# Altium PCB OnePhaseSemLogica_V3.PcbDoc (part 2 of 2)
Units mm, origin at the board's own origin, x right, y up, seen from the top; angles counter-clockwise.
Board outline 104 x 162 mm, 2 copper layers (Top Layer, Bottom Layer); 211 components, 101 nets, 566 pads, 110 vias.
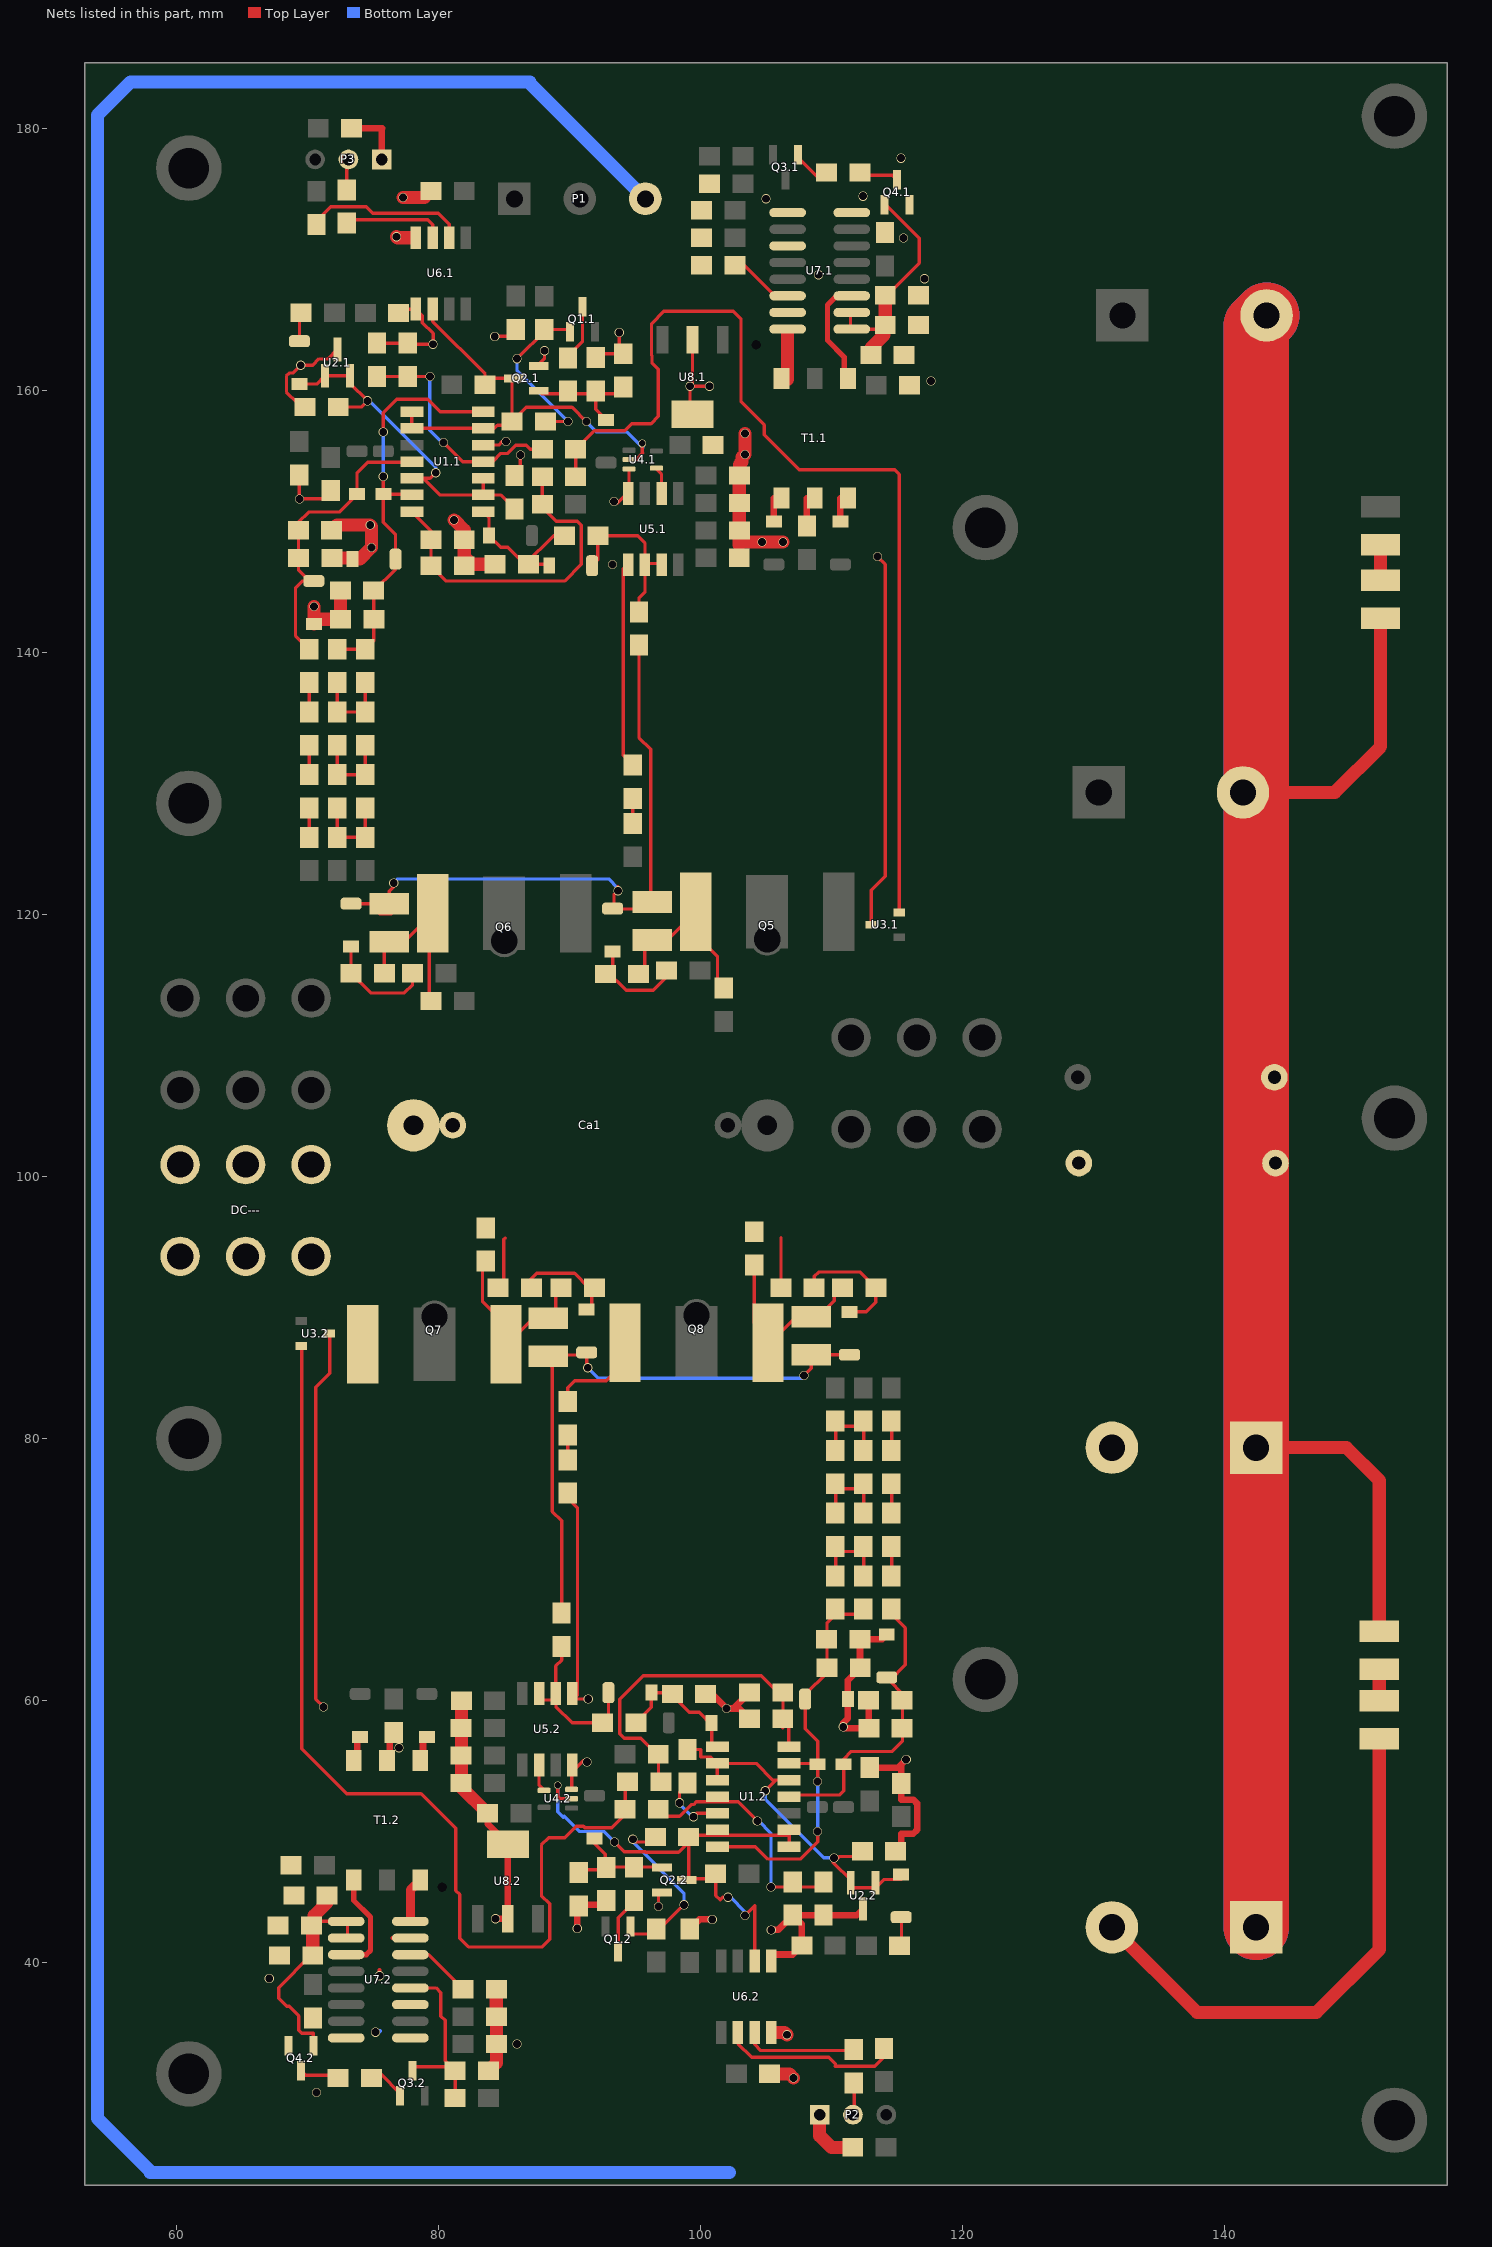
[diagram p2: the nets of this part, all layers, seen from the top]

## Via types
v1: diameter 0.7, hole 0.6, Top Layer to Bottom Layer, 107 vias
v2: diameter 0.6, hole 0.5, Top Layer to Bottom Layer, 3 vias

## Nets (pads, with @x,y where several pads share a name; then routed paths per layer and width w, separated by ;. In a path a pad name is that pad's centre, name@x,y a point inside that pad or via, vN(x,y) a via of type N, cw(c..) or ccw(c..) an arc to the next point about the centre after c; other vN are vias at no path point) (continued)
DT_CON.2: C23.2.2 Q3.2.3 R26.2.2 U7.2.4 | length 14.3
  Top Layer w0.254: U7.2.4@77.868,38.073 79.827,38.073 80.194,37.706 80.194,35.927 80.518,35.603 80.518,32.516 R26.2.2@80.985,32.049 ; Q3.2.3@78.018,31.958 78.109,32.049 R26.2.2@80.985,32.049 ; C23.2.2@81.285,29.672 R26.2.2@81.285,31.749 R26.2.2@80.985,32.049 ; R26.2.2@81.285,32.049 R26.2.2@80.985,32.049
FEEDBACK.1: U7.1.3
FEEDBACK.2: U7.2.3
G1: D7.1.2 R23.1.2 R39.1.2 U5.1.6 U5.1.7 | length 13
  Top Layer w0.254: D7.1.2@91.735,146.6 92.177,147.042 R23.1.2@92.177,148.891 95.209,148.891 95.765,148.335 U5.1.6@95.765,146.775 ; R39.1.2@95.309,143.077 95.309,144.109 95.765,144.565 U5.1.6@95.765,146.675 U5.1.6@95.765,146.775 ; U5.1.7@97.035,146.775 U5.1.6@95.765,146.775
G2: D7.2.2 R23.2.2 R39.2.2 U5.2.6 U5.2.7 | length 14.5
  Top Layer w0.254: U5.2.7@87.706,60.042 U5.2.6@88.976,60.042 ; U5.2.6@88.953,60.433 88.953,62.643 89.408,63.098 R39.2.2@89.408,64.131 ; 88.976,62.252 U5.2.6@88.976,60.042 ; R23.2.2@92.541,58.317 R23.2.2@92.564,58.34 ; D7.2.2@92.983,60.608 92.983,58.759 R23.2.2@92.564,58.34 ; U5.2.6@88.976,60.042 88.976,59.524 90.2,58.3 92.564,58.3 R23.2.2@92.564,58.34
GND: C17.1.1 C17.2.1 C24.1.1 C24.2.1 C25.1.2 C25.2.2 Cin1.1.2 Cin1.2.2 Cin2.1.2 Cin2.2.2 P1.3 P2.1 P3.1 Q4.1.2 Q4.2.2 R26.1.1 R26.2.1 R27.1.1 R27.2.1 R28.1.1 R28.2.1 R29.1.1 R29.2.1 R30.1.1 R30.2.1 R36.2 R37.2 U6.1.4 U6.2.4 U7.1.1 U7.1.7 U7.1.16 U7.2.1 U7.2.7 U7.2.16 | length 275.7
  Top Layer w0.254: Q4.2.2@68.568,33.658 68.41,33.5 Q4.2.2@68.649,33.5 ; U7.2.16@71.966,34.263 U7.2.16@72.968,34.263
  Top Layer w0.3: U7.2.16@72.968,34.263 U7.2.16@73.03,34.2 ; v1(75.518,39.008) 75.518,39.451 ; U7.2.7@76.501,41.883 U7.2.7@77.868,41.883 ; U7.2.1@77.805,34.2 U7.2.1@77.868,34.263
  Top Layer w0.5: R37.2@73.377,179.991 75.704,179.991 75.68,179.966 P3.1@75.68,177.6
  Top Layer w1: R29.2.1@68.962,45.116 R29.2.1@68.976,45.13 R29.2.1@68.962,45.143 ; v1(76.8,171.7) 76.875,171.625 U6.1.4@77.9,171.625 ; v1(77.3,174.7) 78.946,174.7 C17.1.1@79.437,175.191 ; R26.2.1@83.825,31.749 84.425,32.349 R30.2.1@84.425,33.792 C25.2.2@84.425,35.878 84.423,35.88 R27.2.1@84.423,37.986 ; C17.2.1@105.281,31.517 106.783,31.517 v1(107.1,31.2) ; U6.2.4@105.6,34.675 106.425,34.675 v1(106.6,34.5) ; P2.1@109.1,28.4 109.1,26.8 110.007,25.893 R36.2@111.607,25.893
  Bottom Layer w0.3: v1@75.1,34.6 75.335,34.6 75.535,34.8 v1@75.518,34.8
  Bottom Layer w1: 58,24.004 58.1,24.004 ; 87,183.5 86.9,183.5 ; P1.3@95.8,174.6 86.9,183.5 ; 102.204,24.004 58.1,24.004 ; 58.1,24.004 54.004,28.1 54.004,181.004 56.5,183.5 86.9,183.5
  other v1: 70.7,30.1 86,33.8 75.2,34.7 67.1,38.8 117.6,160.7 117.1,168.5 109,168.8 115.5,171.6 105,174.6 112.4,174.8 115.3,177.7
I_FB.1: C24.1.2 Q4.1.1 R28.1.2 R29.1.2 U7.1.9 U7.1.10 | length 17.8
  Top Layer w0.254: U7.1.10@111.45,165.925 111.45,164.655 U7.1.9@111.55,164.655 R28.1.2@113.693,164.655 ; R29.1.2@113.002,162.678 R29.1.2@113.002,163.202 ; Q4.1.1@114.05,174.15 114.15,174.15 116.7,171.6 116.7,169.7 C24.1.2@114.25,167.25 ; C24.1.2@114.102,167.25 C24.1.2@114.35,167.25
  Top Layer w1: R29.1.2@113.002,163.202 114.002,164.202 R28.1.2@114.002,164.964 ; R28.1.2@114.102,164.964 C24.1.2@114.102,167.25
I_FB.2: C24.2.2 Q4.2.1 R28.2.2 R29.2.2 U7.2.9 U7.2.10 | length 18.4
  Top Layer w0.254: C24.2.2@70.168,40.558 C24.2.2@70.416,40.558 ; C24.2.2@70.268,40.558 67.818,38.108 67.818,37.291 68.432,36.677 68.623,36.677 69.36,35.94 69.36,34.832 69.583,34.608 70.468,34.608 Q4.2.1@70.468,33.658 ; R28.2.2@70.416,42.844 70.416,43.606 ; R28.2.2@70.825,43.153 U7.2.9@72.968,43.153 73.068,43.153 U7.2.10@73.068,41.883 ; R29.2.2@71.516,44.606 R29.2.2@71.516,45.13
  Top Layer w1: C24.2.2@70.416,40.558 R28.2.2@70.416,42.844 ; 70.516,43.606 R29.2.2@71.516,44.606
NetC1.1_1: C1.1.1 C2.1.2 R2.1.2 R3.1.2 | length 6.6
  Top Layer w0.254: C1.1.1@72.287,137.686 C2.1.2@72.287,135.443 R3.1.2@74.428,135.443 R2.1.2@74.428,137.686
NetC1.1_2: C1.1.2 C6.1.1 D1.1.1 D2.1.2 R2.1.1 R14.1.2 U1.1.6 U1.1.14 | length 32.2
  Top Layer w0.254: C1.1.2@72.287,140.226 R2.1.1@74.428,140.226 75.08,140.879 R14.1.2@75.08,142.515 75.08,144.692 76.735,146.347 D2.1.2@76.735,147.1 76.735,148.965 75.8,149.9 D1.1.1@75.8,152.065 ; v1@75.8,153.3 D1.1.1@75.8,152.065 ; v1(75.8,156.8) 75.8,158.282 76.81,159.292 79.208,159.292 80.15,158.35 U1.1.14@83.425,158.35 ; U1.1.6@77.975,152 77.91,152.065 D1.1.1@75.8,152.065
  Bottom Layer w0.254: v1@75.8,153.3 v1(75.8,153.4) v1(75.8,156.8)
NetC1.2_1: C1.2.1 C2.2.2 R2.2.2 R3.2.2 | length 6.6
  Top Layer w0.254: R2.2.2@110.313,69.131 110.313,71.375 112.454,71.375 C1.2.1@112.454,69.131
NetC1.2_2: C1.2.2 C6.2.1 D1.2.1 D2.2.2 R2.2.1 R14.2.2 U1.2.6 U1.2.14 | length 31.7
  Top Layer w0.254: U1.2.14@101.293,48.858 104.2,48.858 105.15,47.908 107.608,47.908 108.941,49.241 v1(108.941,50.017) ; U1.2.6@106.743,55.208 108.876,55.208 D1.2.1@108.941,55.143 ; v1(108.941,53.817) D1.2.1@108.941,55.143 ; C1.2.2@112.454,66.591 110.313,66.591 109.661,65.939 109.661,62.125 108.006,60.47 108.006,57.852 108.941,56.917 D1.2.1@108.941,55.143
  Bottom Layer w0.254: v1(108.941,50.017) v1(108.941,53.817)
NetC2.1_1: C2.1.1 C3.1.2 R3.1.1 R4.1.2 | length 6.6
  Top Layer w0.254: C2.1.1@72.287,132.903 C3.1.2@72.287,130.659 R4.1.2@74.428,130.659 R3.1.1@74.428,132.903
NetC2.2_1: C2.2.1 C3.2.2 R3.2.1 R4.2.2 | length 6.6
  Top Layer w0.254: R3.2.1@110.313,73.915 110.313,76.158 112.454,76.158 C2.2.1@112.454,73.915
NetC3.1_1: C3.1.1 C4.1.2 R4.1.1 R5.1.1 | length 6.6
  Top Layer w0.254: C3.1.1@72.287,128.119 C4.1.2@72.287,125.875 R5.1.1@74.428,125.875 R4.1.1@74.428,128.119
NetC3.2_1: C3.2.1 C4.2.2 R4.2.1 R5.2.1 | length 6.6
  Top Layer w0.254: R4.2.1@110.313,78.698 110.313,80.942 112.454,80.942 C3.2.1@112.454,78.698
NetC5.1_1: C5.1.1 D3.1.1 D4.1.2 R9.1.1 R11.1.2 U1.1.4 | length 23.9
  Top Layer w0.254: R9.1.1@70.146,140.226 69.1,141.272 69.1,144.9 69.635,145.435 D4.1.2@70.165,145.435 ; D4.1.2@70.5,145.435 D4.1.2@70.165,145.435 ; D4.1.2@70.165,145.435 69.323,146.277 R11.1.2@69.323,149.309 69.323,149.923 70.1,150.7 72.435,150.7 D3.1.1@73.8,152.065 73.8,153.7 74.599,154.499 U1.1.4@77.199,154.499 ; U1.1.4@77.199,154.499 77.975,154.499 U1.1.4@77.975,154.54 77.24,154.54 U1.1.4@77.199,154.499
NetC5.2_1: C5.2.1 D3.2.1 D4.2.2 R9.2.1 R11.2.2 U1.2.4 | length 22.9
  Top Layer w0.254: U1.2.4@106.743,52.617 106.925,52.8 110.624,52.8 110.941,53.117 110.941,55.541 111.517,56.117 114.641,56.117 115.418,56.894 115.418,60.54 114.429,61.529 115.641,62.741 115.641,65.546 R9.2.1@114.595,66.591
NetC7.1_1: C7.1.1 D5.1.1 Q2.1.1 R13.1.2 R15.1.1 | length 8.9
  Top Layer w0.254: Q2.1.1@87.65,159.95 87.877,159.723 R15.1.1@92.009,159.723 ; D5.1.1@92.8,157.735 92.009,158.526 R15.1.1@92.009,159.723 ; C7.1.1@94.109,159.737 94.096,159.723 R15.1.1@92.009,159.723
NetC7.2_1: C7.2.1 D5.2.1 Q2.2.1 R13.2.2 R15.2.1 | length 8.4
  Top Layer w0.254: C7.2.1@90.631,47.08 90.645,47.094 R15.2.1@92.731,47.094 ; D5.2.1@91.941,49.082 92.731,48.292 92.731,47.3 96.658,47.3 Q2.2.1@96.864,47.094
NetC8.1_1: C8.1.1 R17.1.1 R20.1.1 U1.1.11 | length 18.4
  Top Layer w0.254: C8.1.1@75.325,161.044 R20.1.1@77.675,161.044 v1(79.356,161.044) ; v1(80.4,156) 81.86,154.54 U1.1.11@83.425,154.54 84.14,154.54 84.769,155.169 85.285,155.169 85.916,155.799 86.7,155.799 87.008,155.491 R17.1.1@87.937,155.491
  Bottom Layer w0.254: v1(79.356,161.044) 79.356,156.944 80.3,156 v1(80.4,156)
NetC8.2_1: C8.2.1 R17.2.1 R20.2.1 U1.2.11 | length 18.2
  Top Layer w0.254: R17.2.1@96.804,51.327 96.962,51.169 98.403,51.169 99.307,52.073 99.473,52.073 99.677,52.277 102.881,52.277 v1(104.341,50.817) ; v1(105.385,45.773) C8.2.1@109.416,45.773
  Bottom Layer w0.254: v1(104.341,50.817) 104.441,50.817 105.385,49.873 v1(105.385,45.773)
NetC9.1_1: C9.1.1 R16.1.1 R18.1.1 R21.1.1 U1.1.7 | length 26.1
  Top Layer w0.254: U1.1.7@77.975,150.73 79.437,149.268 C9.1.1@79.437,148.591 R21.1.1@79.437,146.591 80.597,145.43 89.63,145.43 90.899,146.699 90.899,147.426 90.9,147.427 90.9,149.7 90.6,150 89,150 87.937,151.063 R16.1.1@87.937,151.291 R18.1.1@87.937,153.391
NetC9.2_1: C9.2.1 R16.2.1 R18.2.1 R21.2.1 U1.2.7 | length 27.2
  Top Layer w0.254: R18.2.1@96.804,53.427 96.804,55.754 95.441,57.117 94.183,57.117 93.841,57.459 93.841,59.391 93.842,59.392 93.842,60.118 95.624,61.9 104.631,61.9 106.304,60.227 C9.2.1@106.304,58.617 ; C9.2.1@106.281,57.94 C9.2.1@106.281,58.617 106.743,58.155 U1.2.7@106.743,56.478
NetC14.1_1: C14.1.1 D7.1.1 D8.1.1 R23.1.1 U1.1.8 | length 11.3
  Top Layer w0.254: U1.1.8@83.425,150.73 83.865,150.29 D8.1.1@83.865,148.9 84.765,148 85.3,148 86.591,146.709 C14.1.1@86.609,146.709 ; D7.1.1@88.356,146.709 C14.1.1@86.863,146.709 C14.1.1@86.609,146.709 ; R23.1.1@89.637,148.891 88.791,148.891 C14.1.1@86.609,146.709
NetC14.2_1: C14.2.1 D7.2.1 D8.2.1 R23.2.1 U1.2.8 | length 10.1
  Top Layer w0.254: R23.2.1@95.081,58.317 96.253,59.489 D7.2.1@96.253,60.608 97.745,60.608 C14.2.1@97.854,60.498 ; C14.2.1@98.131,60.608 98.135,60.509 98.15,60.108 99.158,59.1 99.9,59.1 100.876,58.124 U1.2.8@100.876,56.527
NetC26_2: C26.2 C27.2 C28.1 C29.1 C80.1 C81.2 R33.2 R34.1 | length 290.3
  Top Layer w1: C26.2@141.4,129.3 142.4,129.3 148.4,129.3 151.9,132.8 R33.2@151.9,142.6 ; C28.1@142.4,79.3 149.3,79.3 151.8,76.8 R34.1@151.8,65.3
  Top Layer w5: C29.1@142.4,42.7 C28.1@142.4,79.3 142.4,129.3 142.4,164.9 C27.2@143.2,165.7
  Bottom Layer w5: C29.1@142.4,42.7 C28.1@142.4,79.3 142.4,164.9 C27.2@143.2,165.7
NetC28_2: C28.2 C29.2 C30.2.1 C31.2.1 C81.1 Ca1.2 DC---.1 Q7.3 Q8.3 R35.2 R41.2.2 R44.2.2 R45.2.1 | length 58.6
  Top Layer w0.254: Q7.3@74.166,87.012 Q7.3@74.166,87.2 ; C30.2.1@84.554,91.498 85,91.944 85,95.2 85.1,95.3 ; R45.2.1@89.876,82.814 89.876,83.866 90.411,84.401 92.801,84.401 94.232,85.832 Q8.3@94.232,87.3 ; Q8.3@94.24,87.3 Q8.3@94.24,88.93 ; C31.2.1@106.143,91.501 106.143,95.343
  Top Layer w1: C29.2@131.4,42.7 137.9,36.2 147,36.2 151.8,41 R35.2@151.8,57.1
NetC30.1_2: C30.1.2 D12.1.1 R40.1.2 | length 7.1
  Top Layer w0.254: R40.1.2@92.823,115.709 94.333,114.2 96.4,114.2 C30.1.2@97.423,115.223 ; R40.1.2@93.3,115.862 D12.1.1@93.3,117.165 D12.1.1@93.3,117.265
NetC30.2_2: C30.2.2 D12.2.1 R40.2.2 | length 7.2
  Top Layer w0.254: C30.2.2@86.594,91.498 C30.2.2@86.594,91.985 ; C30.2.2@86.894,91.985 87.51,92.6 90.393,92.6 R40.2.2@91.494,91.498 ; D12.2.1@91.718,89.943 R40.2.2@91.718,91.346
NetC31.1_2: C31.1.2 D13.1.1 R43.1.2 | length 8.5
  Top Layer w0.254: D13.1.1@73.342,117.545 73.335,117.538 R43.1.2@73.335,115.506 74.842,114 77.4,114 78.034,114.634 C31.1.2@78.034,115.506
NetC31.2_2: C31.2.2 D13.2.1 R43.2.2 | length 9.6
  Top Layer w0.254: C31.2.2@108.683,91.501 108.683,92.374 109.01,92.7 112.184,92.7 R43.2.2@113.382,91.501 113.382,90.382 112.663,89.663 D13.2.1@111.376,89.663 D13.2.1@111.382,89.67
NetD6.1_2: D6.1.2 R22.1.2 | length 2.2
  Top Layer w0.254: D6.1.2@69.4,163.735 R22.1.2@69.4,165.909
NetD6.2_2: D6.2.2 R22.2.2 | length 2.2
  Top Layer w0.254: R22.2.2@115.341,40.908 D6.2.2@115.341,43.082
NetD9.1_1: D9.1.1 T1.1.6 | length 1.8
  Top Layer w0.254: D9.1.1@110.669,149.982 D9.1.1@110.679,149.972
  Top Layer w0.5: D9.1.1@110.669,149.982 110.669,151.762
NetD9.2_1: D9.2.1 T1.2.6 | length 1.6
  Top Layer w0.254: D9.2.1@73.8,56.996 D9.2.1@74.039,57.235
  Top Layer w0.5: T1.2.6@73.8,55.695 D9.2.1@73.8,56.996
NetD10.1_1: D10.1.1 T1.1.4 | length 1.8
  Top Layer w0.5: D10.1.1@105.589,149.982 105.589,151.762
NetD10.2_1: D10.2.1 T1.2.4 | length 1.8
  Top Layer w0.5: T1.2.4@78.829,55.546 D10.2.1@78.829,57.325
NetD12.1_2: D12.1.2 D13.1.2 R38.1.2 R39.1.1 R42.1.2 | length 48.4
  Top Layer w0.254: D13.1.2@73.342,120.815 75.505,120.815 75.505,120.052 76.397,120.052 76.767,120.422 R42.1.2@76.767,120.81 ; R42.1.2@76.263,120.81 76.263,121.763 76.6,122.1 v1(76.6,122.4) ; D12.1.2@93.4,120.435 93.4,121.5 v1(93.7,121.8) ; v1@93.7,121.9 v1@93.7,122.1 ; D12.1.2@93.835,120.4 95.792,120.4 R38.1.2@96.329,120.937 ; R39.1.1@95.309,140.537 95.309,133.491 96.2,132.6 96.2,121.577 R38.1.2@96.585,121.193
  Bottom Layer w0.254: v1(76.6,122.4) 76.9,122.7 93,122.7 93.7,122 v1@93.7,121.9
NetD12.2_2: D12.2.2 D13.2.2 R38.2.2 R39.2.1 R42.2.2 | length 45.3
  Top Layer w0.254: R38.2.2@88.133,86.015 88.7,85.448 88.7,74.425 89.408,73.717 R39.2.1@89.408,66.671 ; R38.2.2@88.389,86.271 88.491,86.373 D12.2.2@91.318,86.373 ; D12.2.2@91.318,86.573 D12.2.2@91.318,86.373 ; v1(91.4,85.4) 91.318,85.482 D12.2.2@91.318,86.373 ; v1(107.9,84.8) 108.455,85.355 R42.2.2@108.455,86.398 ; R42.2.2@107.951,86.398 R42.2.2@107.951,86.786 ; R42.2.2@109.213,86.393 D13.2.2@111.376,86.393
  Bottom Layer w0.254: v1(91.4,85.4) 92.2,84.6 v1@107.9,84.6
NetQ1.1_1: Q1.1.1 R10.1.2 R12.1.1 | length 13.2
  Top Layer w0.254: v1(86,162.4) 88.223,164.623 89.877,164.623 Q1.1.1@90.05,164.45 ; R12.1.1@88.163,157.609 v1(89.891,157.609) v1@89.9,157.6
  Bottom Layer w0.254: v1(86,162.4) 86,161.5 v1(89.891,157.609) v1@89.9,157.6
NetQ1.1_3: Q1.1.3 R13.1.1 | length 4.5
  Top Layer w0.254: R13.1.1@89.891,162.263 89.891,162.591 91,163.7 Q1.1.3@91,166.35
NetQ1.2_1: Q1.2.1 R10.2.2 R12.2.1 | length 13.2
  Top Layer w0.254: Q1.2.1@94.691,42.367 94.864,42.194 96.518,42.194 v1(98.741,44.417) ; v1@94.841,49.217 94.85,49.208 R12.2.1@96.578,49.208
  Bottom Layer w0.254: v1@94.841,49.217 98.741,45.317 v1(98.741,44.417)
  other v1: 94.841,49.417
NetQ1.2_3: Q1.2.3 R13.2.1 | length 4.5
  Top Layer w0.254: Q1.2.3@93.741,40.467 93.741,43.445 R13.2.1@94.85,44.554
NetQ3.1_1: Q3.1.1 R31.1.2 | length 2.8
  Top Layer w0.254: Q3.1.1@107.45,177.75 108.891,176.309 R31.1.2@109.623,176.309
NetQ3.2_1: Q3.2.1 R31.2.2 | length 2.8
  Top Layer w0.254: R31.2.2@74.894,31.498 75.627,31.498 Q3.2.1@77.068,30.058
NetQ4.1_3: Q4.1.3 R31.1.1 | length 2.5
  Top Layer w0.254: R31.1.1@112.654,176.4 114.65,176.4 Q4.1.3@115,176.05
NetQ4.2_3: Q4.2.3 R31.2.1 | length 2.5
  Top Layer w0.254: Q4.2.3@69.518,31.758 69.868,31.408 R31.2.1@71.864,31.408
NetQ5_1: Q5.1 R38.1.1 R40.1.1 R41.1.1 | length 10.3
  Top Layer w0.254: R40.1.1@95.763,115.709 R38.1.1@95.763,117.771 ; R38.1.1@96.063,117.771 R38.1.1@96.329,118.037 97.473,118.037 Q5.1@98.599,119.163 ; Q5.1@99.632,118.194 99.906,118.194 101.3,116.8 101.3,114.854 R41.1.1@101.791,114.363 R41.1.1@101.991,114.163
NetQ6_1: Q6.1 R42.1.1 R43.1.1 R44.1.1 | length 13.9
  Top Layer w0.254: R43.1.1@75.875,115.506 75.875,117.522 R42.1.1@76.263,117.91 77.407,117.91 Q6.1@79.3,119.803 ; R44.1.1@79.437,113.391 79.3,113.527 Q6.1@79.3,119.803 ; Q6.1@79.566,119.43 Q6.1@79.566,120.069 Q6.1@79.3,119.803
NetQ7_1: Q7.1 R38.2.1 R40.2.1 R41.2.1 | length 13.9
  Top Layer w0.254: R41.2.1@83.609,93.437 83.373,93.201 83.373,90.427 85.16,88.64 Q7.1@85.16,87.2 ; Q7.1@85.086,87.2 85.086,87.012 87.245,89.171 R38.2.1@88.389,89.171 R38.2.1@88.654,89.437 ; R38.2.1@88.954,89.437 R40.2.1@88.954,91.498
NetQ8_1: Q8.1 R42.2.1 R43.2.1 R44.2.1 | length 14.2
  Top Layer w0.254: R44.2.1@104.109,93.237 104.109,88.82 105.152,87.777 105.152,87.139 107.311,89.298 R42.2.1@108.455,89.298 108.998,89.298 110.2,90.5 110.2,90.859 R43.2.1@110.842,91.501
NetR6.1_1: R6.1.1 R7.1.2 | length 2.2
  Top Layer w0.254: R6.1.1@70.146,125.875 R7.1.2@70.146,128.119
NetR6.2_1: R6.2.1 R7.2.2 | length 2.2
  Top Layer w0.254: R7.2.2@114.595,78.698 R6.2.1@114.595,80.942
NetR7.1_1: R7.1.1 R8.1.2 | length 2.2
  Top Layer w0.254: R7.1.1@70.146,130.659 R8.1.2@70.146,132.903
NetR7.2_1: R7.2.1 R8.2.2 | length 2.2
  Top Layer w0.254: R8.2.2@114.595,73.915 R7.2.1@114.595,76.158
NetR8.1_1: R8.1.1 R9.1.2 | length 2.2
  Top Layer w0.254: R8.1.1@70.146,135.443 R9.1.2@70.146,137.686
NetR8.2_1: R8.2.1 R9.2.2 | length 2.2
  Top Layer w0.254: R9.2.2@114.595,69.131 R8.2.1@114.595,71.375
NetR24.1_1: R24.1.1 U6.1.2 | length 12.4
  Top Layer w0.254: R24.1.1@70.709,172.637 70.709,172.909 71.8,174 74.5,174 74.992,173.508 79.992,173.508 80.835,172.665 U6.1.2@80.835,171.625
NetR24.2_1: R24.2.1 U6.2.2 | length 13.6
  Top Layer w0.254: U6.2.2@102.865,34.675 102.865,33.835 103.908,32.792 109.808,32.792 110.3,32.3 ; 110.3,32.1 113.14,32.1 113.152,32.112 113.312,32.112 114.008,32.808 R24.2.1@114.008,33.471
NetR25.1_1: R25.1.1 U6.1.3 | length 7.8
  Top Layer w0.254: R25.1.1@73.009,172.737 73.273,173 79.2,173 79.565,172.635 U6.1.3@79.565,171.625
NetR25.2_1: R25.2.1 U6.2.3 | length 9.5
  Top Layer w0.254: U6.2.3@104.135,34.675 104.135,33.765 104.6,33.3 111.637,33.3 R25.2.1@111.708,33.371 R25.2.1@111.148,33.931
NetR27.1_2: R27.1.2 U7.1.6 | length 5.1
  Top Layer w0.254: R27.1.2@102.635,169.522 R27.1.2@103.235,169.522 ; R27.1.2@103.235,169.365 R27.1.2@103.235,169.522 ; U7.1.6@106.65,167.195 105.687,167.195 103.359,169.522 R27.1.2@103.235,169.522
NetR27.2_2: R27.2.2 U7.2.6 | length 5.3
  Top Layer w0.254: U7.2.6@77.868,40.613 79.256,40.613 R27.2.2@81.883,37.986 ; R27.2.2@81.283,37.986 R27.2.2@81.283,38.143
NetR32_2: R32.2 R33.1 | length 2.7
  Top Layer w1: R33.1@151.9,145.5 R32.2@151.9,148.2
NetR34_2: R34.2 R35.1 | length 2.4
  Top Layer w1: R35.1@151.8,60 R34.2@151.8,62.4
NetR45.1_2: R45.1.2 R99.1.1 | length 1.9
  Top Layer w0.254: R45.1.2@94.841,126.934 R99.1.1@94.841,128.839
NetR45.2_2: R45.2.2 R99.2.1 | length 1.9
  Top Layer w0.254: R99.2.1@89.876,78.369 R45.2.2@89.876,80.274
NetT1.1_1: T1.1.1 U7.1.11 | length 7.7
  Top Layer w0.4: T1.1.1@110.969,161.502 110.969,162.531 109.696,163.804 109.696,166.496 110.395,167.195 U7.1.11@111.55,167.195
NetT1.1_3: T1.1.3 U7.1.8 | length 3.6
  Top Layer w1: T1.1.3@106.65,160.8 U7.1.8@106.65,164.4
NetT1.2_1: T1.2.1 U7.2.11 | length 7.9
  Top Layer w0.4: U7.2.11@72.968,40.613 74.492,40.613 74.822,40.942 74.822,43.486 73.549,44.758 T1.2.1@73.549,46.306
NetT1.2_3: T1.2.3 U7.2.8 | length 3.5
  Top Layer w0.7: U7.2.8@77.868,43.153 77.868,45.545 T1.2.3@78.629,46.306
NetU4.1_4: U4.1.4 U5.1.2 | length 1.9
  Top Layer w0.254: U4.1.4@96.65,153.95 97.035,153.565 U5.1.2@97.035,152.225
NetU4.2_4: U4.2.4 U5.2.2 | length 2.1
  Top Layer w0.254: U5.2.2@87.683,55.083 87.683,53.543 U4.2.4@88.068,53.158
OK!.1: Q2.1.3 R1.1.1 R12.1.2 U1.1.1 U1.1.2 U1.1.13 U4.1.2 U6.1.6 | length 35.9
  Top Layer w0.254: U1.1.1@77.975,158.35 U1.1.2@77.975,157.08 U1.1.13@83.425,157.08 84.263,157.08 84.514,157.331 85.286,157.331 85.315,157.301 R12.1.2@85.623,157.609 ; U6.1.6@79.565,166.175 79.565,165.235 83.563,161.237 R1.1.1@83.563,160.409 84.054,160.9 85.623,160.9 R12.1.2@85.623,157.609 ; v1(91.3,157.6) 90.2,158.7 86.714,158.7 R12.1.2@85.623,157.609 ; U4.1.2@94.55,154.7 95.1,154.7 95.604,155.204 95.56,155.248 v2(95.56,155.94)
  Bottom Layer w0.254: v1(91.3,157.6) 92.1,156.8 94.4,156.8 95.6,155.6
OK!.2: Q2.2.3 R1.2.1 R12.2.2 U1.2.1 U1.2.2 U1.2.13 U4.2.2 U6.2.6 | length 39.2
  Top Layer w0.254: v2(89.114,53.537) 89.114,52.71 89.316,52.508 U4.2.2@90.168,52.508 ; v1(93.441,49.217) 94.192,48.466 95.783,48.466 95.829,48.42 98.33,48.42 R12.2.2@99.094,49.185 ; R12.2.2@99.094,49.598 R12.2.2@99.094,49.185 ; v1(102.1,45) 101.7,45 101.5,44.8 101.178,45.122 101.178,46.408 99.118,46.408 R12.2.2@99.118,49.208 ; v1(103.4,43.6) 104.135,44.335 U6.2.6@104.135,40.625 ; U1.2.1@106.766,48.858 106.766,49.737 99.647,49.737 R12.2.2@99.118,49.208 ; R12.2.2@99.094,49.185 R12.2.2@99.118,49.208
  Bottom Layer w0.254: v2(89.114,53.537) 89.114,51.511 89.525,51.1 89.6,51.175 90.757,50.017 92.641,50.017 v1(93.441,49.217) ; v1(102.1,45) 102.1,44.8 102.3,45 103.4,43.9 v1(103.4,43.6)
OK_OUT1: P3.2 R25.1.2 | length 2.5
  Top Layer w0.254: R25.1.2@73.009,175.277 73.009,177.469 P3.2@73.14,177.6 P3.2@73.209,177.531
OK_OUT2: P2.2 R25.2.2 | length 2.2
  Top Layer w0.254: P2.2@111.731,28.248 R25.2.2@111.731,30.44
S1: C5.1.2 C6.1.2 C7.1.2 C8.1.2 C9.1.2 C10.1.2 C11.1.1 C12.1.2 C13.1.1 C14.1.2 C15.1.2 C16.1.2 C18.1.1 C19.1.2 C20.1.2 C21.1.2 C22.1.2 D2.1.1 D4.1.1 Q2.1.2 R11.1.1 R14.1.1 R15.1.2 R19.1.2 R20.1.2 R21.1.2 R99.1.2 T1.1.5 U1.1.12 U2.1.3 U3.1.3 U4.1.3 U5.1.4 U5.1.5 U6.1.5 U8.1.1 | length 121.4
  Top Layer w0.254: C22.1.2@69.391,153.523 69.391,151.709 71.177,151.709 C16.1.2@71.791,152.323 ; R19.1.2@69.823,158.709 69.5,159.033 69.229,159.033 68.409,159.852 68.409,161.078 68.632,161.301 68.901,161.301 v1(69.5,161.9) 70.411,161.9 70.892,162.381 71.581,162.381 U2.1.3@72.3,163.1 ; C8.1.2@75.325,163.584 R20.1.2@77.675,163.584 77.759,163.5 v1(79.6,163.5) 79.6,164.326 78.784,165.142 78.784,165.686 U6.1.5@78.295,166.175 77.261,166.175 C20.1.2@76.977,165.891 ; U1.1.12@83.425,155.81 84.61,155.81 84.88,156.08 v1@85.14,156.08 ; v1(84.3,164.1) 85.373,164.1 C18.1.1@85.909,164.637 ; v1@85.12,156.1 v1@85.14,156.08 ; v1(85.16,156.08) v1@85.14,156.08 ; C10.1.2@85.809,153.477 86.3,153.967 86.26,154.007 v1(86.26,155.06) ; Q2.1.2@87.65,161.85 87.6,161.9 88.1,162.4 v1(88.1,163) ; R15.1.2@92.009,162.477 92.309,162.777 C7.1.2@94.109,162.777 93.8,163.086 v1(93.8,164.4) ; v1(93.4,151.5) 93.589,151.5 93.679,151.409 94.55,152.28 U4.1.3@94.55,153.98 ; U5.1.5@94.495,146.775 94.1,146.38 94.1,132.12 R99.1.2@94.841,131.379 ; U8.1.1@99.4,158.15 99.2,158.35 v1(99.2,160.3) ; U8.1.1@99.4,163.85 99.4,160.5 v1(99.2,160.3) ; v1(100.7,160.3) v1(99.2,160.3) ; C21.1.2@102.963,153.477 C21.1.2@102.977,153.491 ; U3.1.3@113.025,119.2 113.025,121.825 114.1,122.9 114.1,146.7 v1(113.5,147.3)
  Top Layer w0.5: C19.1.2@108.129,149.627 108.129,151.762
  Top Layer w1: v1(70.5,143.5) D4.1.1@70.5,142.165 70.85,142.515 R14.1.1@72.54,142.515 72.523,142.532 C6.1.2@72.523,144.709 ; R11.1.1@71.863,149.309 72.254,149.7 v1(74.8,149.7) 74.9,149.6 v1(74.9,148) 74,147.1 D2.1.1@73.465,147.1 73.374,147.191 C5.1.2@71.877,147.191 ; v1(81.2,150.1) 81.977,149.323 C9.1.2@81.977,148.591 81.977,147.3 82.567,146.709 C14.1.2@84.323,146.709 ; C21.1.2@102.963,153.477 102.963,148.2 103.163,148.4 v1(104.7,148.4) v1(106.3,148.4) ; C21.1.2@102.977,153.491 102.977,154.331 103.181,154.535 103.181,154.881 v1(103.4,155.1) v1(103.4,156.7)
  other v1: 93.3,146.7 69.4,151.7
S2: C5.2.2 C6.2.2 C7.2.2 C8.2.2 C9.2.2 C10.2.2 C11.2.1 C12.2.2 C13.2.1 C14.2.2 C15.2.2 C16.2.2 C18.2.1 C19.2.2 C20.2.2 C21.2.2 C22.2.2 D2.2.1 D4.2.1 Q2.2.2 R11.2.1 R14.2.1 R15.2.2 R19.2.2 R20.2.2 R21.2.2 R99.2.2 T1.2.5 U1.2.12 U2.2.3 U3.2.3 U4.2.3 U5.2.4 U5.2.5 U6.2.5 U8.2.1 | length 130.7
  Top Layer w0.254: v1(71.241,59.517) 70.641,60.117 70.641,83.917 71.716,84.992 U3.2.3@71.716,88.008 ; C21.2.2@81.764,53.389 C21.2.2@81.764,53.731 ; R99.2.2@89.899,75.438 90.618,74.72 U5.2.5@90.618,60.828 ; U5.2.5@90.246,60.042 U5.2.5@90.321,60.117 ; U5.2.5@90.298,60.508 U5.2.5@90.618,60.828 ; U5.2.4@90.479,54.826 91.061,55.408 91.152,55.317 v1(91.341,55.317) ; C7.2.2@90.6,44.423 C7.2.2@90.608,44.431 ; v1(91.441,60.117) U5.2.5@90.321,60.117 ; v1@96.6,44.376 96.676,44.3 v1(96.8,44.3) 96.8,45.09 Q2.2.2@97.068,45.358 ; v1(98.4,52.2) C10.2.2@98.4,53 ; v1(99.465,51.142) 99.724,51.4 U1.2.12@100.923,51.4 ; U5.2.5@90.321,60.117 90.618,60.414 U5.2.5@90.618,60.828
  Top Layer w0.257: U4.2.3@90.168,53.228 90.168,55.028 U5.2.4@90.223,55.083
  Top Layer w0.5: T1.2.5@76.289,55.446 C19.2.2@76.289,57.58 ; C13.2.1@83.754,51.398 83.754,50.596 U8.2.1@85.3,49.05 U8.2.1@85.3,43.35 v1(84.35,43.35) ; v1(90.6,42.6) C7.2.2@90.6,44.423 ; C7.2.2@90.608,44.431 92.408,44.431 R15.2.2@92.708,44.731 ; C18.2.1@99.191,42.563 99.927,43.3 v1(100.9,43.3) ; C14.2.2@100.394,60.498 100.902,60.498 v1(102,59.4) 102.524,59.4 ; C9.2.2@103.741,58.617 102.958,59.4 102.524,59.4 ; R21.2.2@103.741,60.617 102.524,59.4 ; v1(105.4,42.5) 105.919,42.5 R20.2.2@107.043,43.624 ; U6.2.5@105.405,40.625 107.049,40.625 C20.2.2@107.741,41.317 107.741,42.926 R20.2.2@107.043,43.624 ; U2.2.3@112.418,44.108 111.934,43.624 C8.2.2@109.393,43.624 R20.2.2@107.043,43.624 ; C5.2.2@112.841,60.017 112.854,60.004 R11.2.1@112.854,57.898 111.002,57.898 v1(110.9,58) 110.9,58.3 111.253,58.653 D2.2.1@111.253,60.108 111.253,61.557 C6.2.2@112.194,62.498 112.177,62.515 R14.2.1@112.177,64.693 113.868,64.693 D4.2.1@114.218,65.043 ; C16.2.2@112.927,54.885 115.085,54.885 115.327,55.127 ; R19.2.2@114.894,48.498 115.327,48.931 115.327,49.841 116.234,49.841 116.529,50.136 116.529,52.153 116.234,52.449 115.327,52.449 C22.2.2@115.327,53.685 115.327,55.127 ; v1(115.7,55.5) 115.327,55.127
  Top Layer w1: C21.2.2@81.741,53.717 81.741,53.412 81.764,53.389 C13.2.1@83.754,51.398 ; C15.2.2@81.754,55.817 C11.2.1@81.754,59.998 ; C21.2.2@81.764,53.731 81.778,53.744 C11.2.1@81.778,59.608
  Bottom Layer w0.254: v1(98.4,52.2) 98.3,52.2 98.6,51.9 99.358,51.142 v1(99.465,51.142)
  other v1: 77,56.4
VREF.1: C10.1.1 D6.1.1 R19.1.1 U1.1.5 U1.1.9 U1.1.10 U2.1.1 U2.1.2 | length 28
  Top Layer w0.254: D6.1.1@69.4,160.465 70.715,160.465 U2.1.1@71.35,161.1 U2.1.2@73.25,161.1 73.25,160.533 v1(74.6,159.183) 74.126,158.709 R19.1.1@72.363,158.709 ; U1.1.5@77.975,153.27 U1.1.5@78.83,153.27 ; v1(79.8,153.7) 79.37,153.27 U1.1.5@78.83,153.27 ; U1.1.10@83.425,153.27 U1.1.9@83.425,152 ; C10.1.1@85.809,150.937 84.746,152 U1.1.9@83.425,152 ; U1.1.5@78.83,153.27 80.1,152 U1.1.9@83.425,152
  Bottom Layer w0.254: v1@74.6,159.317 79.8,154.117 v1(79.8,153.7)
VREF.2: C10.2.1 D6.2.1 R19.2.1 U1.2.5 U1.2.9 U1.2.10 U2.2.1 U2.2.2 | length 28.4
  Top Layer w0.254: C10.2.1@98.908,56.271 C10.2.1@99.008,56.271 100.037,56.271 100.037,55.697 100.804,55.697 U1.2.9@101.293,55.208 ; U1.2.10@101.293,53.938 U1.2.9@101.293,55.208 ; v1(104.941,53.117) 105.761,53.938 ; U1.2.5@106.743,53.938 105.761,53.938 ; R19.2.1@112.378,48.108 110.615,48.108 110.141,47.634 111.491,46.284 111.491,45.717 113.391,45.717 114.026,46.352 D6.2.1@115.341,46.352 ; U1.2.9@101.293,55.208 104.25,55.208 105.52,53.938 105.761,53.938
  Bottom Layer w0.254: v1(104.941,53.117) 104.941,52.459 109.4,48 v1(110.2,48)
VTEMP.1: R17.1.2 R18.1.2 U3.1.2 | length 78.7
  Top Layer w0.254: R18.1.2@90.477,153.391 R17.1.2@90.477,155.491 91.886,156.9 92.031,156.9 ; U3.1.2@115.175,120.15 115.175,153.562 114.818,153.918 107.54,153.918 104.858,156.6 104.858,157.342 103.1,159.1 103.1,165.4 102.492,166.008 97.208,166.008 96.269,165.069 96.269,162.642 96.3,162.611 96.3,162.1 96.792,161.608 96.792,157.992 96.231,157.431 94.746,157.431 94.214,156.899 92.032,156.899 ; 92.031,156.9 92.032,156.899
VTEMP.2: R17.2.2 R18.2.2 U3.2.2 | length 77.9
  Top Layer w0.254: U3.2.2@69.566,87.058 69.566,56.334 73,52.9 78.682,52.9 81.333,50.249 81.333,45.507 81.633,45.207 81.633,41.867 82.3,41.2 87.924,41.2 88.5,41.776 88.5,44.489 87.869,45.12 87.869,48.986 88.414,49.531 89.654,49.531 90.529,50.406 91.078,50.406 91.175,50.309 93.246,50.309 94.264,51.327 R18.2.2@94.264,53.427
pads on no net: U4.1.0 U4.2.0 U5.1.3 U5.2.3
copper on no net:
  other v1: 72.118,33.008

## Polygon pours and split planes (outlines as drawn)
S2 on Bottom Layer "gnd" (solid, pour order 82): 89.8,38.4 87.2,41 82.42,41 81.4,42.02 81.4,49.9 78.8,52.5 70.3,52.5 69.3,53.5 69.4,53.6 69.4,60.4 69.4,61.2 70.2,62 88.4,62 107.9,62 108.4,62.5 108.4,82.5 115.9,82.5 117.4,81 117.4,41.4 114.4,38.4
S1 on Bottom Layer "gnd" (solid, remove dead copper, pour order 81): 82.9,167.4 85,169.5 94.7,169.5 97.7,166.5 102.326,166.5 102.516,166.398 103.28,164.675 103.28,158.662 104.5,156.9 106.089,154.744 115.1,154.1 115.6,153.3 115.6,148.6 115.6,146 115.1,145.5 113.7,145.2 76.4,145.1 76.4,124.6 76.3,124.7 68.9,124.7 68.9,125 67.4,126.5 67.4,167 67.8,167.4
GND on Bottom Layer "gnd" (solid, pour order 80): 95.1,176 95.6,176 99.6,180 99.8,180.2 116.2,180.2 116.6,180.2 118.2,178.6 118.2,159.2 118.2,159 116.6,158 115.6,158 107.8,158 105.6,160.2 105.6,167.1 104.1,168.6 99.66,168.6 98.864,169.051 95.776,172.968 95.2,174.3 95,174.5 95,175.9
GND on Bottom Layer "gnd" (solid, pour order 79): 66.59,26.075 65.29,28.075 65.29,29.075 65.29,47.656 67.1,48.7 78.615,48.7 79.19,48.125 79.19,40.675 81.09,38.775 85.29,38.775 87.39,36.675 87.39,28.175 87.29,28.075 85.29,26.075
D2 on Bottom Layer "D2" (solid, pour order 77): 77.9,84 77.9,91.3 77.894,91.446 77.919,91.677 80.603,97.939 89.64,102.58 101.198,100.033 105.649,98.608 107.477,99.277 109.8,101.6 109.8,112.1 123.203,112.1 123.5,111.58 123.5,97.191 115.6,93.6 110.3,90.1 102.5,86.6 100,86.6 97.4,86.6 96,87.4 83.8,87.4 82.6,86.6 81.5,84.02 81.7,83.82
S1 on Bottom Layer "GND_S1" (solid, pour order 66): 68.6,166.671 68.829,166.9 68.829,167.105 69.295,167.571 74.9,167.571 75.062,167.638 75.423,168 96.2,168 97.9,166.3 102.7,166.3 102.8,166.2 103.26,165.09 103.26,158.84 105,157.1 105,156.7 107.3,154.4 114.7,154.4 115.4,153.7 115.4,148.6 113.8,147 112.2,145.4 77.6,145.4 77.5,145.3 76.8,146 74.2,146 73.7,145.5 73.7,142.1 73.1,141.5 69.5,141.5 68.6,142.7
D1 on Bottom Layer "pos" (solid, pour order 72): 95.6,120 118.871,120 118.871,114.9 109.1,114.9 107.6,113.4 107,112.8 107,103.326 105.849,102.316 105.499,102.362 104.834,102.26 78,108.9 76.2,108.9 74.529,107.771 71.657,104.9 58.8,104.9 58.8,115.3 59.4,115.3 59.5,115.4 71.1,115.4 74.8,119.1 75.7,120
D1 on Bottom Layer "pos" (solid, pour order 70): 117.9,114.9 117.9,120 121.7,123.8 121.7,177.3 121.7,178.2 122.7,179.2 122.8,179.3 130.7,179.3 133.8,179.3 135,178.1 135,162.8 135,129.7 120.2,114.9
GND on Bottom Layer "GND" (solid, pour order 61): 65.3,28.1 68.4,25 68.4,23.6 103,23.6 109.8,30.4 109.8,32.1 108.9,33 106.3,35.6 100,35.6 99.2,34.8 99.1,34.7 89.4,34.7 86.299,37.801
GND on Bottom Layer "GND" (solid, pour order 62): 98.3,172.8 93.1,172.8 84.5,172.8 82.7,171 82.6,170.9 76.4,170.9 68.4,170.9 67.4,171.9 67.2,172.1 67.2,177.3 67.2,182.3 68.5,183.6 91.4,183.6 96.4,183.6 99.8,180.2
GND on Bottom Layer "GND" (solid, pour order 65): 102.649,24.1 115.7,24.1 116,24.4 116.8,25.2 116.8,30.3 116.8,33.2 115.5,34.5 115,35 107.6,35 100.2,35 99.4,34.2 99.1,34.2
D1 on Bottom Layer "D1" (solid, pour order 27): 122.211,117.389 127.376,114.616 127.706,113.767 127.82,113.68 127.82,107.88 127.82,107.2 128.42,106.6 128.56,106.46 129.48,106.46 131.68,106.46 133.36,108.14 135,109.78 135,130.151
+12V_ISO.1 on Top Layer "+12V" (solid, pour order 64): 99.628,146.516 99.642,146.53 99.642,154.184
D2 on Top Layer "D2" (solid, pour order 75): 89.2,123 91.7,123 91.7,113.978 92.678,113 101.5,113 104.001,113.067 106.05,113.85 108.254,114.982 108.3,115 108.8,115.8 109.249,117.2 109.249,123.3 109.276,123.3 112.2,123.3 112.2,116.876 112.85,116.35 114.2,115.8 117.6,115.3 119.7,115 122.85,114.05 123.5,113.4 123.7,112.9 123.7,102 109.887,102 109.354,105.832 108.618,107.014 107.109,108.036 105.34,108.58 101.15,107.594 99.375,106.103 98.026,103.76 90.5,105.5 89.2,105.88 89.2,108.036
NetC28_2 on Top Layer "neg" (solid, pour order 74): 59,102.4 74.488,102.4 76.3,104.6 76.27,104.75 77.186,105.666 78.9,105.9 105.509,99.2 117.86,99.2 128.1,94.8 122.35,84.4 121.5,84.4 118.729,84.4 115.991,93.586 114.229,94.9 80.94,94.9 77.1,93.3 74.411,91.663 72.454,92.2 59,92.2
S1 on Top Layer "GND_S1" (solid, remove dead copper, pour order 68): 68.6,166.671 68.829,166.9 68.829,167.105 69.295,167.571 74.9,167.571 75.062,167.638 75.623,168.2 95.877,168.2 96.238,167.838 96.562,167.838 97.9,166.5 97.9,166.3 102.7,166.3 102.8,166.2 103.3,165.7 103.3,159.3 104.7,157.9 105,157.9 105,156.7 105.1,156.6 107.4,154.3 114.8,154.3 115.4,153.7 115.4,148.6 113.8,147 112.2,145.4 77.6,145.4 77.5,145.3 76.8,146 74.2,146 73.7,145.5 73.7,142.1 73.1,141.5 69.5,141.5 68.6,142.7
NetC28_2 on Top Layer "Neg" (solid, pour order 71): 118.7,84.4 118.7,39 120.6,37.1 120.7,37 127.4,37 133,37 135.5,39.5 135.5,91.7 132.4,94.8 122.5,94.8 116.473,98.827 116.2,99.1 115,99.1 115,96.9
NetC28_2 on Top Layer "Neg" (solid, pour order 73): 73.1,90.1 72.7,90.9 71.6,92.6 73.2,94.2 74.7,94.2 75.2,94.2 75.4,94 75.4,90.1
NetC28_2 on Top Layer "Neg" (solid, pour order 76): 93.1,90.1 93.1,93.3 91.5,94.9 91.5,95.5 97.2,95.5 99.855,95.069 95.826,92.921 95.4,91.5 95.4,90.1
NetC28_2 on Top Layer "Neg" (solid, pour order 78): 75.4,90.1 76.154,92.246 78.1,94.4 77.7,94.8 75.5,94.8 75,94.8 74.3,94.1
S2 on Top Layer "GND_S2" (solid, remove dead copper, pour order 67): 116.3,40.429 116.071,40.2 116.071,39.995 115.605,39.529 110,39.529 109.838,39.462 108.805,38.429 89.495,38.429 88.662,39.262 88.338,39.262 87,40.6 87,40.8 82.2,40.8 82.1,40.9 81.1,41.9 81.1,48.8 81.1,50.3 79.1,52.3 70.6,52.3 69.5,53.4 69.5,58.5 71.1,60.1 72.8,62 107.4,62 108.1,61.1 110.7,61.1 111.2,61.6 111.2,65 111.8,65.6 115.4,65.6 116.3,64.4
D2 on Top Layer "D2" (solid, pour order 63): 89.3,118.2 89.3,115.9 88.1,114.7 86.2,112.5 86,111.6 86,108.2 86.2,107.3 86.6,106.6 86.7,106.5 89.2,105.88 89.2,106.5
GND on Top Layer "GND" (solid, remove dead copper, pour order 69): 117.5,160.7 116.4,159.6 115.5,159.6 106.2,159.6 105.2,160.6 105.2,167.1 103.6,168.7 103.5,168.6 99.5,168.6 99.4,168.6 96.269,171.731 94.784,175.322 97.626,179.055 98.4,179.6 99.4,179.6 109.3,179.6 116.4,179.6 117.5,178.5
GND on Top Layer "GND" (solid, remove dead copper, pour order 83): 66,47.4 67.1,48.5 68,48.5 77.7,48.5 78.3,47.9 78.3,45.5 78.3,41 79.907,39.393 80.542,39.102 85.359,38.741 86.879,37.221 88.716,32.778 85.874,29.045 85.1,28.5 84.1,28.5 74.2,28.5 67.1,28.5 66,29.6
NetC28_2 on Top Layer "C28" (solid, pour order 25): 123.689,96.109 125.1,97.52 125.88,98.3 127.427,99.847 127.68,100.458 127.68,101.288 127.943,101.923 128.04,102.02 128.523,102.22 129.14,102.22 129.84,102.22 130.16,101.9 135.48,96.58 135.48,91.109

## Keep-outs
Keep-Out Layer:
  the board outline again, w0.5

## Silkscreen, mask and mechanical layers (free items; w line width, h text height)
Top Overlay:
  lines w0.254: 95.6,132.9 95.692,132.562 95.8,132.5 ; 96.138,132.592 95.8,132.5 ; 96.2,133.2 95.8,132.5 ; 98.2,166.4 103.2,166.4 ; 103.6,159.7 103.6,165.8
  lines w0.5: 54,24 156,24 156,184 54,184 54,24
  text "Power Board" at 63.3,163.9 h2 r270
  text "UNICAMP/KartFly" at 57.44,163.4 h1.5 r270
  text "(One Phase)" at 60.08,163.22 h2 r270
  text "+" at 62.9,116.1 h5
  text "-" at 62.8,87.4 h5
  text "F. S. Garcia, J. F. Guerreiro," at 60.12,69.6 h1 r270
  text "H. G. Junior, A. C. Prates" at 58,67.9 h1 r270
  text "May 2017" at 62.68,61.82 h1.5 r270

## Text inside footprints (layer, text, board x,y; h text height)
Q5: Top Overlay "G" at 101.192,121.796 h0.65; Top Overlay "D" at 107.292,121.796 h0.65; Top Overlay "S" at 112.292,121.796 h0.65
Q6: Top Overlay "G" at 81.126,121.669 h0.65; Top Overlay "D" at 87.226,121.669 h0.65; Top Overlay "S" at 92.226,121.669 h0.65
Q7: Top Overlay "G" at 83.6,85.6 h0.65 r180; Top Overlay "D" at 77.5,85.6 h0.65 r180; Top Overlay "S" at 72.5,85.6 h0.65 r180
Q8: Top Overlay "G" at 103.6,85.7 h0.65 r180; Top Overlay "D" at 97.5,85.7 h0.65 r180; Top Overlay "S" at 92.5,85.7 h0.65 r180